# Altium PCB Stylophone.PcbDoc
Units mm, origin at the board's own origin, x right, y up, seen from the top; angles counter-clockwise.
Board outline 90 x 30 mm, 2 copper layers (Top Layer, Bottom Layer); 56 components, 50 nets, 158 pads, 2 vias.
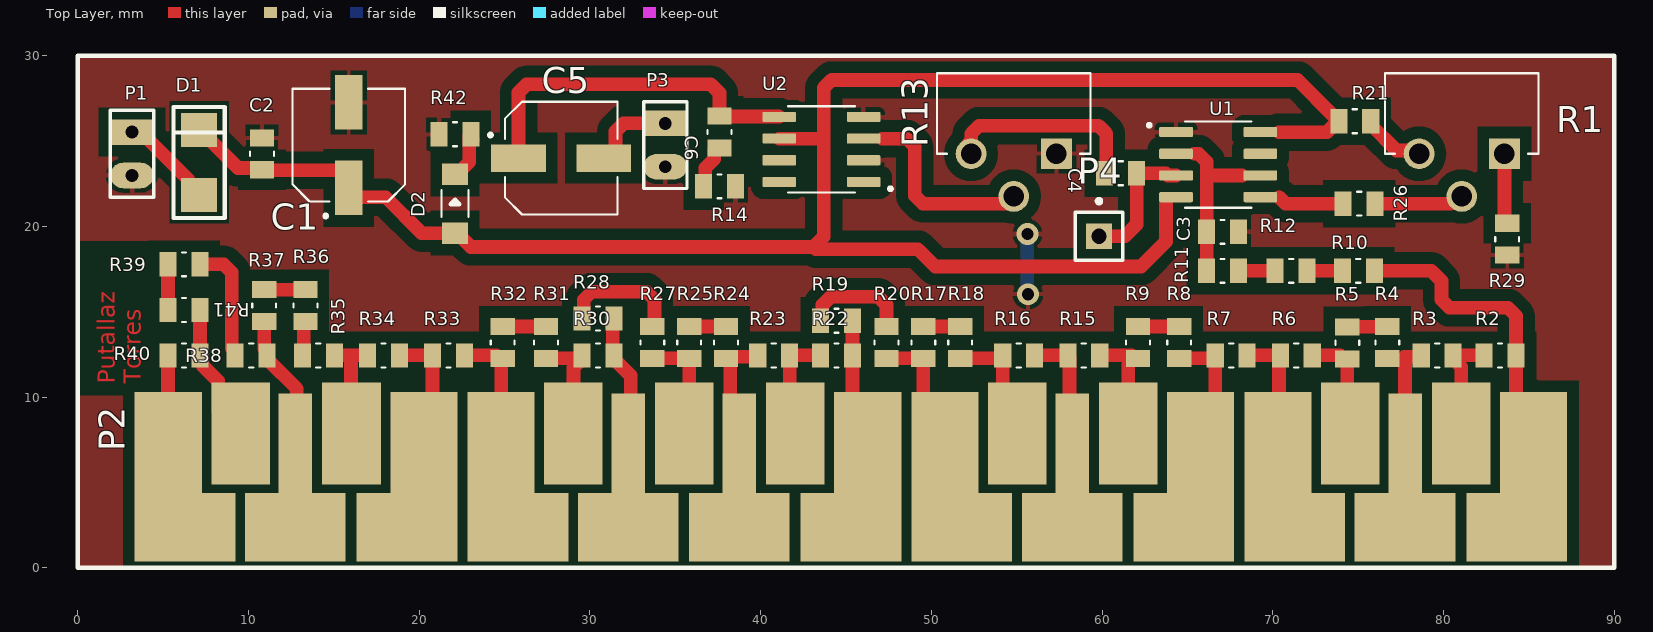
[diagram p0: Top Layer view]
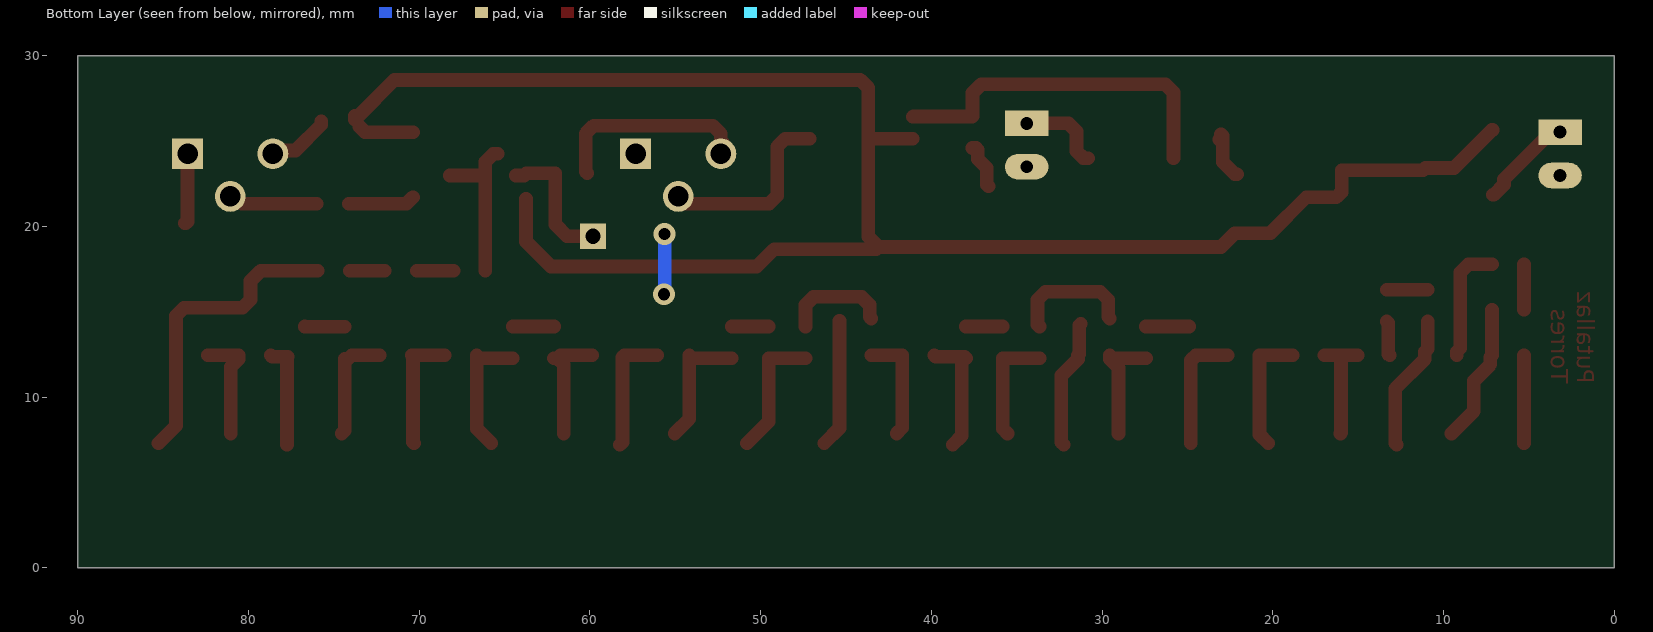
[diagram p1: Bottom Layer view, seen from below]
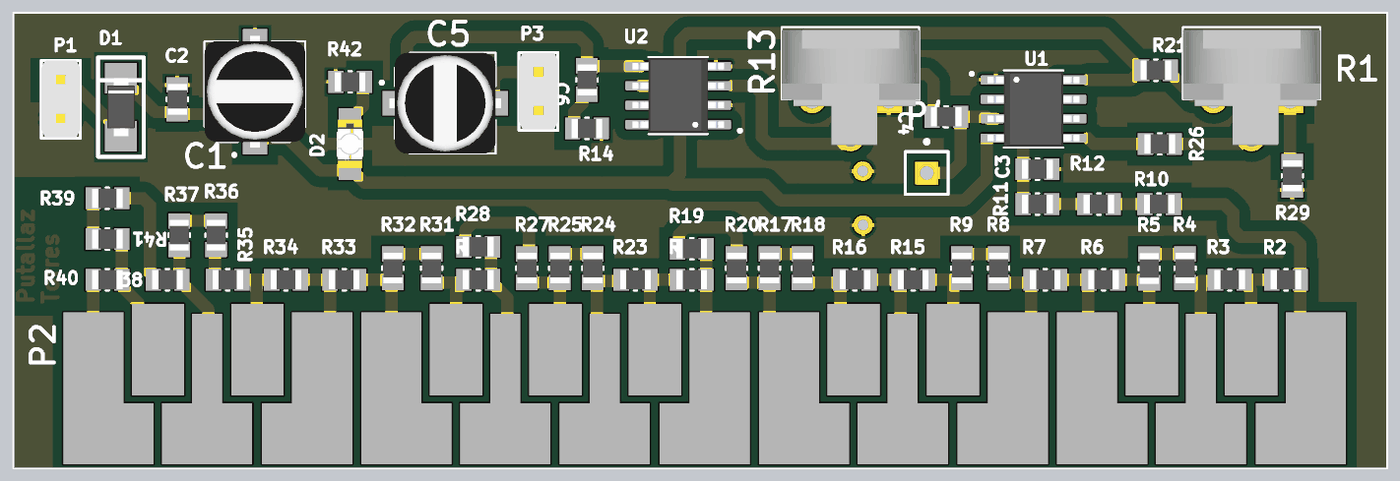
[diagram p2: 3D render of the assembled board from above, using the file's embedded part models]

## Layer stack, top to bottom
Top Solder: solder mask 0.0102, Solder Resist, Dk 3.5
Top Layer: signal copper 0.0356
Dielectric 1: dielectric 0.32, FR-4, Dk 4.8
Bottom Layer: signal copper 0.0356
Bottom Solder: solder mask 0.0102, Solder Resist, Dk 3.5

## Board outline
0,0 0,30 90,30 90,0

## Design rules (kind name [scope] priority, off if disabled: settings)
Clearance [InPolygon] p1: gap=0.7 ignorepadtopadclearanceinfootprint=TRUE
PolygonConnect [All] p1: connectstyle=Relief reliefconductorwidth=0.254 reliefentries=4 polygonreliefangle="90 Angle" airgapwidth=0.254
RoutingVias [All] p1: holewidth=0.711 width=1.27 viastyle="Through Hole" minholewidth=0.711 minwidth=1.27 maxholewidth=0.711 maxwidth=1.27
SolderMaskExpansion [All] p1: expansion=0.102 istentingtop=FALSE
Width [All] p1: maxlimit=1 minlimit=0.7 preferedwidth=0.8
30 further rules are at their usual default settings.

## Components (designator, comment, footprint, x,y, rotation, side; value= is the part's Value field where it differs from the comment)
C1 "100uF 25V" "CAP SMD 100uF 25V" 15.875,24.765 r90 top value=100pF
C2 "100nF" "0805 res-cap" 10.795,24.257 r270 top value=100pF
C3 "33nF" "0805 res-cap" 67.056,19.685 r180 top value=100pF
C4 "100nF" "0805 res-cap" 61.087,23.114 r180 top value=100pF
C5 "100uF" "CAP SMD 100uF 25V" 28.321,24.003 r0 top value=2200uF
C6 "50nF" "0805 res-cap" 37.592,25.527 r90 top value=100pF
D1 "Diode 1N4007" DO214AC 7.112,23.749 r90 top
D2 "LED3" "1206 LED" 22.098,21.336 r90 top
P1 "Header 2" HDR1X2 3.175,25.527 r270 top
P2 "Teclado Stylophone" "Teclado Stylophone" 4.787,0.874 r0 top
P3 "Header 2" HDR1X2 34.417,26.035 r270 top
P4 "Stylus" PIN1 59.817,19.431 r0 top
R1 "Tuning 4k7" "TRIMMING POTENTIOMETER" 83.566,24.257 r180 top value=1k
R2 "1K5" "0805 res" 83.312,12.446 r0 top value=1K
R3 "1K5" "0805 res" 79.629,12.446 r0 top value=1K
R4 "1K5" "0805 res" 76.708,13.208 r270 top value=1K
R5 "100R" "0805 res" 74.363,13.183 r90 top value=1K
R6 "1K8" "0805 res" 71.374,12.446 r0 top value=1K
R7 "1K8" "0805 res" 67.564,12.446 r0 top value=1K
R8 "1K" "0805 res" 64.516,13.208 r90 top
R9 "1K" "0805 res" 62.103,13.208 r90 top
R10 "560R" "0805 res" 75.011,17.399 r0 top value=1K
R11 "12K" "0805 res" 71.074,17.399 r0 top value=1K
R12 "22K" "0805 res" 67.056,17.399 r0 top value=1K
R13 "Volume" "TRIMMING POTENTIOMETER" 57.324,24.257 r180 top value=1k
R14 "10R" "0805 res" 37.592,22.352 r180 top value=1K
R15 "2K2" "0805 res" 58.928,12.446 r0 top value=1K
R16 "2K2" "0805 res" 55.118,12.446 r0 top value=1K
R17 "1K2" "0805 res" 49.53,13.208 r90 top value=1K
R18 "1K2" "0805 res" 51.689,13.208 r90 top value=1K
R19 "1K2" "0805 res" 44.45,14.478 r0 top value=1K
R20 "1K2" "0805 res" 47.371,13.208 r90 top value=1K
R21 "Res1" "0805 res" 74.803,26.162 r180 top value=1K
R22 "2K7" "0805 res" 44.45,12.446 r0 top value=1K
R23 "2K7" "0805 res" 40.767,12.446 r0 top value=1K
R24 "1K5" "0805 res" 37.973,13.208 r270 top value=1K
R25 "1K5" "0805 res" 35.814,13.208 r90 top value=1K
R26 "4k7" "0805 res" 75.057,21.336 r180 top value=1K
R27 "1K5" "0805 res" 33.655,13.208 r270 top value=1K
R28 "1K5" "0805 res" 30.48,14.605 r180 top value=1K
R29 "Res1" "0805 res" 83.727,19.25 r90 top value=3K3
R30 "3K3" "0805 res" 30.48,12.446 r0 top value=1K
R31 "1K8" "0805 res" 27.432,13.208 r270 top value=1K
R32 "1K8" "0805 res" 24.892,13.208 r90 top value=1K
R33 "3K9" "0805 res" 21.717,12.446 r0 top value=1K
R34 "3K9" "0805 res" 17.907,12.446 r0 top value=1K
R35 "2K7" "0805 res" 14.096,12.446 r0 top value=1K
R36 "1K5" "0805 res" 13.335,15.367 r270 top value=1K
R37 "100" "0805 res" 10.922,15.367 r90 top value=1K
R38 "2K7" "0805 res" 10.159,12.446 r0 top value=1K
R39 "1K5" "0805 res" 6.223,17.78 r0 top value=1K
R40 "4K7" "0805 res" 6.223,12.446 r180 top value=1K
R41 "100" "0805 res" 6.223,15.113 r180 top value=1K
R42 "470" "0805 res" 22.098,25.4 r0 top value=1K
U1 "555" SOIC-8 66.802,23.622 r0 top
U2 "LM386" SOIC-8 43.561,24.511 r180 top

## Footprints (in the part's own frame and the unit in brackets; to place one, negate y for a bottom-side part, rotate by r counter-clockwise, add the part's x,y. Pads: shape width x height; smd on the part's side, far side on the other; paste and mask are expansions set on the pad)
"0805 res" [mm]
  rect 1x1.42 smd: 1(-0.935,0) 2(0.935,0)
  silkscreen extent -0.12,-0.7 0.12,0.7, body extent -1,-0.63 1,0.63, height 0.6
"0805 res-cap" [mm]
  rect 1x1.42 smd: 1(-0.935,0) 2(0.935,0)
  silkscreen extent -0.12,-0.7 0.12,0.7, body extent -1,-0.63 1,0.63, height 0.6
"1206 LED" [mm]
  rect 1.25x1.5 smd: 1(-1.725,0) 2(1.725,0)
  silkscreen extent -0.78,-0.8 0.78,0.8, body extent -1.6,-0.8 1.6,0.8, height 1.2
"CAP SMD 100uF 25V" [mm]
  rect 3.2x1.6 smd: 1(-2.5,0) 2(2.5,0)
  silkscreen extent -4.25,-3.3 3.3,3.3, body extent -3.65,-3.3 3.65,3.3, height 5.8
DO214AC [mm]
  rect 2x2.1 smd: 1(-1.9,0) 2(1.9,0)
  silkscreen extent -3.25,-1.5 3.25,1.5, body extent -1.9,-0.9 1.9,0.9, height 1.3
HDR1X2 [mm] "Connector; Header; 2 Position"
  rect 1.5x2.54 hole 0.75: 1(0,0)
  oval 1.5x2.54 hole 0.75: 2(2.54,0)
  silkscreen extent -1.27,-1.27 3.81,1.27, body extent -1.28,-1.27 3.75,1.27, height 11.94
PIN1 [mm] "Connector; Plug"
  rect 1.5x1.5 hole 0.9: 1(0,0)
  silkscreen extent -1.4,-1.4 1.4,2.17
SOIC-8 [mm]
  rrect25% 1.97x0.6 smd: 1(-2.47,1.905) 2(-2.47,0.635) 3(-2.47,-0.635) 4(-2.47,-1.905) 5(2.47,-1.905) 6(2.47,-0.635) 7(2.47,0.635) 8(2.47,1.905)
  silkscreen extent -4.14,-2.52 1.95,2.52, body extent -3,-2.45 3,2.45, height 1.75
"Teclado Stylophone" [mm]
  rect 5.9x4 smd: A1(33.959,1.5) A2(79.5,1.5) B1(40.5,1.5) C1(1.5,1.5) C2(47,1.5) D1(7.959,1.5) D2(53.459,1.5) E1(14.5,1.5) E2(60,1.5) F1(21,1.5) F2(66.5,1.5) G1(27.459,1.5) G2(72.959,1.5)
  rect 1.96x6 smd: A1(33.959,6.338) D1(7.959,6.338) D2(53.459,6.338) G1(27.459,6.338) G2(72.959,6.338)
  rect 3.93x6 smd: A2(80.485,6.429) B1(41.485,6.429) C1(0.515,6.429) C2(46.015,6.429) E1(15.485,6.429) E2(60.985,6.429) F1(20.015,6.429) F2(65.515,6.429)
  rect 3.43x6 smd: A#1(37.25,7) C#1(4.75,7) C#2(50.25,7) D#1(11.25,7) D#2(56.75,7) F#1(24.25,7) F#2(69.75,7) G#1(30.75,7) G#2(76.25,7)
"TRIMMING POTENTIOMETER" [mm]
  rect 1.8x1.8 hole 1.2: 1(0,0)
  round 1.8 hole 1.2: 2(2.5,2.5) 3(5,0)
  silkscreen extent -2,-4.72 7,0, body extent -2.01,-4.53 6.98,3.56, height 10.49

## Part data
C1: library part "Cap Pol1", "Polarized Capacitor (Radial)", LatestRevisionDate=17-Jul-2002, LatestRevisionNote="Re-released for DXP Platform.", PackageDescription="Polarized Capacitor (Radial); 2 Leads", PackageReference=RB7.6-15, Published=8-Jun-2000, Publisher="Altium Limited"
C2 C3 C4 C6: library part Cap, "Capacitor", LatestRevisionDate=17-Jul-2002, LatestRevisionNote="Re-released for DXP Platform.", PackageDescription="Radial Cap, Thru-Hole; 2 Leads; 0.3 in Pin Spacing", PackageReference=RAD-0.3, Published=8-Jun-2000, Publisher="Altium Limited"
C5: library part "Cap Pol D16mm", "Polarized Capacitor (Axial)", LatestRevisionDate=17-Jul-2002, LatestRevisionNote="Re-released for DXP Platform.", PackageDescription="Polarized Capacitor; 2 Leads", PackageReference=POLAR0.8, Published=8-Jun-2000, Publisher="Altium Limited"
D1: "1 Amp General Purpose Rectifier", Code_JEDEC=DO-204-AL, ComponentLink1Description="Manufacturer Link", ComponentLink1URL=http://www.fairchildsemi.com/, ComponentLink2Description=Datasheet, ComponentLink2URL=http://www.fairchildsemi.com/ds/1N%2F1N4001.pdf, DatasheetVersion=1998, LatestRevisionDate=17-Jul-2002, LatestRevisionNote="Re-released for DXP Platform.", PackageDescription="Diode, Axial; Body 5.2 x 2.7 mm (LxDia. max), Lead Dia. 0.86 mm (max)", PackageReference=DO-41, PackageVersion=Aug-1999, Published=8-Jun-2000, Publisher="Altium Limited"
D2: "Typical BLUE SiC LED", DatasheetVersion=16-Apr-2002, LatestRevisionDate=17-Dec-2003, LatestRevisionNote="PCB Footprint replaced.", PackageDescription="SM LED; 2 C-Bend Leads; Body 3.5 x 2.8 x 1.9 mm, inc leads (LxWxH typ)", PackageReference=3.5X2.8X1.9, PackageVersion=16-Apr-2002, Published=8-Jun-2000, Publisher="Altium Limited"
P1 P3: "Header, 2-Pin", LatestRevisionDate=17-Jul-2002, LatestRevisionNote="Re-released for DXP Platform.", Publisher="Altium Limited"
P4: library part Plug, "Plug", LatestRevisionDate=17-Jul-2002, LatestRevisionNote="Re-released for DXP Platform.", Publisher="Altium Limited"
R1 R13: library part Potentiometer, "4K7", position=0.5, SimulationGenericComponent=True
R2 R3 R4 R5 R6 R7 R8 R9 R10 R11 R12 R14 R15 R16 R17 R18 R19 R20 R22 R23 R24 R25 R26 R27 R28 R30 R31 R32 R33 R34 R35 R36 R37 R38 R39 R40 R41 R42: library part Res1, "Resistor", LatestRevisionDate=17-Jul-2002, LatestRevisionNote="Re-released for DXP Platform.", PackageDescription="Axial Device, Thru-Hole; 2 Leads; 0.3 in Pin Spacing", PackageReference=AXIAL-0.3, Published=8-Jun-2000, Publisher="Altium Limited"
R21 R29: "Resistor", LatestRevisionDate=17-Jul-2002, LatestRevisionNote="Re-released for DXP Platform.", PackageDescription="Axial Device, Thru-Hole; 2 Leads; 0.3 in Pin Spacing", PackageReference=AXIAL-0.3, Published=8-Jun-2000, Publisher="Altium Limited"

## Via types
v1: diameter 1.27, hole 0.711, Top Layer to Bottom Layer, 2 vias

## Nets (pads, with @x,y where several pads share a name; then routed paths per layer and width w, separated by ;. In a path a pad name is that pad's centre, name@x,y a point inside that pad or via, vN(x,y) a via of type N, cw(c..) or ccw(c..) an arc to the next point about the centre after c; other vN are vias at no path point)
A1: P2.A1 R23.1 R24.2 | length 7.4
  Top Layer w0.8: P2.A1@38.746,7.212 38.227,7.731 38.227,12.173 38.127,12.273 R24.2 38.059,12.36 39.746,12.36 R23.1
A2: P2.A2 R2.2 R10.2 | length 17.9
  Top Layer w0.8: R10.2 79.287,17.399 79.883,16.803 79.883,15.709 80.352,15.24 83.778,15.24 84.247,14.771 R2.2 84.247,8.328 P2.A2@85.272,7.303
A#1: P2.A#1 R22.1 R23.2 | length 6.5
  Top Layer w0.8: P2.A#1 41.702,8.209 R23.2 R22.1
B1: P2.B1 R19.2 R22.2 | length 7.5
  Top Layer w0.8: R19.2 R22.2 45.385,8.19 P2.B1@46.272,7.303
C1: P2.C1 R40.2 | length 5.1
  Top Layer w0.8: R40.2 5.288,7.317 P2.C1@5.302,7.303
C2: P2.C2 R17.1 R20.1 | length 7.7
  Top Layer w0.8: R20.1 R17.1 49.53,8.575 P2.C2@50.802,7.303
C#1: P2.C#1 R40.1 R41.1 | length 8.2
  Top Layer w0.8: R41.1 R40.1 7.258,12.346 7.258,11.919 8.222,10.955 8.222,9.189 P2.C#1
C#2: P2.C#2 R16.1 R18.1 | length 7.5
  Top Layer w0.8: R18.1 54.083,12.273 R16.1@54.183,12.373 ; R16.1 R16.1@54.183,12.373 ; P2.C#2 54.183,8.728 R16.1@54.183,12.373
D1: P2.D1 R37.1 R38.2 | length 8
  Top Layer w0.8: R37.1 10.922,12.828 11.094,12.656 R38.2 11.094,12.236 12.827,10.503 12.827,7.293 P2.D1@12.746,7.212
D2: P2.D2 R15.1 R16.2 | length 7.3
  Top Layer w0.8: R16.2 R15.1 58.093,12.346 58.093,7.365 P2.D2@58.246,7.212
D#1: P2.D#1 R34.1 R35.2 | length 6.5
  Top Layer w0.8: R35.2 16.002,12.446 ; P2.D#1 16.002,7.909 16.002,12.446 ; R34.1 16.002,12.446
D#2: P2.D#2 R9.1 R15.2 | length 6.9
  Top Layer w0.8: R15.2 61.72,12.446 R9.1@61.893,12.273 ; P2.D#2 61.537,11.917 R9.1@61.893,12.273 ; R9.1 R9.1@61.893,12.273
E1: P2.E1 R33.1 R34.2 | length 7.3
  Top Layer w0.8: R34.2 R33.1 20.782,7.813 P2.E1@20.272,7.303
E2: P2.E2 R7.1 R8.1 | length 7.7
  Top Layer w0.8: R8.1 66.529,12.273 R7.1@66.629,12.373 ; P2.E2@65.772,7.303 66.629,8.16 R7.1@66.629,12.373 ; R7.1 R7.1@66.629,12.373
F1: P2.F1 R32.1 R33.2 | length 7.1
  Top Layer w0.8: R33.2 24.509,12.446 24.682,12.273 24.702,12.273 24.802,12.173 P2.F1@24.802,7.303
F2: P2.F2 R6.1 R7.2 | length 7.1
  Top Layer w0.8: R7.2 R6.1 70.358,12.365 70.358,7.359 P2.F2@70.302,7.303
F#1: P2.F#1 R30.1 R31.2 | length 6.9
  Top Layer w0.8: R31.2 29.445,12.273 R30.1@29.545,12.373 ; P2.F#1 29.037,11.728 29.545,12.236 R30.1@29.545,12.373 ; R30.1 R30.1@29.545,12.373
F#2: P2.F#2 R5.1 R6.2 | length 6.6
  Top Layer w0.8: R6.2 73.955,12.446 74.153,12.248 R5.1 74.363,8.048 P2.F#2
G1: P2.G1 R28.1 R30.2 | length 7.6
  Top Layer w0.8: R28.1@31.242,14.305 31.328,14.219 31.328,12.532 R30.2 31.415,12.236 32.385,11.266 32.385,7.351 P2.G1@32.246,7.212
G2: P2.G2 R3.1 R4.2 | length 6.2
  Top Layer w0.8: P2.G2@77.746,7.212 77.746,12.314 77.701,12.36 78.608,12.36 R3.1
G#1: P2.G#1 R25.1 R27.2 | length 6.7
  Top Layer w0.8: R27.2 R25.1 35.814,8.151 P2.G#1
G#2: P2.G#2 R2.1 R3.2 | length 6.6
  Top Layer w0.8: P2.G#2 81.037,11.763 80.564,12.236 R3.2 R2.1
GND: C1.2 C2.1 C3.1 P1.2 P3.2 R13.1 R14.1 R29.1 R42.1 U1.1 U2.2 U2.4 | length 3.2
  Bottom Layer w0.8: v1@55.626,16.383 v1(55.626,19.558)
  other v1: 55.656,16.032
NetC3_2: C3.2 R12.1 U1.2 U1.6 | length 9.4
  Top Layer w0.8: 65.405,24.257 65.652,24.257 66.121,23.788 66.121,22.987 ; R12.1 C3.2 66.121,22.987 ; 68.199,22.987 66.121,22.987
NetC4_1: C4.1 P4.1 U1.3 | length 7.9
  Top Layer w0.8: P4.1 61.341,19.431 62.022,20.112 C4.1 63.72,23.114 63.847,22.987 U1.3
NetC4_2: C4.2 R13.3 | length 11.3
  Top Layer w0.8: R13.3@52.197,24.892 52.336,25.031 52.336,25.439 52.804,25.908 59.783,25.908 60.252,25.439 60.252,23.214 C4.2
NetC5_1: C5.1 C6.2 U2.5 | length 20.9
  Top Layer w0.8: C5.1 25.821,27.852 26.29,28.321 37.084,28.321 37.592,27.813 C6.2 37.615,26.439 41.068,26.439 U2.5
NetC5_2: C5.2 P3.1 | length 5.1
  Top Layer w0.8: C5.2 31.096,24.003 31.496,24.403 31.496,25.566 31.965,26.035 P3.1
NetC6_1: C6.1 R14.2 | length 2.8
  Top Layer w0.8: R14.2 36.757,22.452 36.757,23.422 37.282,23.947 37.282,24.492 37.382,24.592 C6.1
NetD1_1: D1.1 P1.1 | length 5.6
  Top Layer w0.8: P1.1 3.695,25.527 6.462,22.76 6.462,22.449 7.062,21.849 D1.1
NetD2_2: D2.2 R42.2 | length 3.2
  Top Layer w0.8: D2.2 22.223,23.061 22.933,23.771 22.933,25.3 R42.2 23.033,25.19 R42.2@23.133,25.09
NetR1_1: R1.1 R29.2 | length 4.2
  Top Layer w0.8: R1.1 83.566,20.285 83.666,20.185 R29.2
NetR1_2: R1.2 R26.1 | length 5.2
  Top Layer w0.8: R26.1 80.374,21.336 80.795,21.757 R1.2
NetR1_3: R1.3 R21.1 | length 3.7
  Top Layer w0.8: R21.1 75.738,25.952 77.242,24.448 78.375,24.448 R1.3
NetR4_1: R4.1 R5.2 | length 2.4
  Top Layer w0.8: R5.2 74.376,14.13 76.695,14.13 R4.1
NetR8_2: R8.2 R9.2 | length 2.4
  Top Layer w0.8: R9.2 R8.2
NetR10_1: R10.1 R11.2 | length 2.1
  Top Layer w0.8: R11.2 R10.1
NetR11_1: R11.1 R12.2 | length 2.1
  Top Layer w0.8: R12.2 R11.1
NetR13_2: R13.2 U2.3 | length 10.8
  Top Layer w0.8: 47.117,25.146 48.553,25.146 49.022,24.677 49.022,21.805 49.491,21.336 54.483,21.336 R13.2@54.63,21.483
NetR17_2: R17.2 R18.2 | length 2.2
  Top Layer w0.8: R17.2 R18.2
NetR19_1: R19.1 R20.2 | length 6.3
  Top Layer w0.8: R19.1@43.515,14.605 43.615,14.705 43.615,15.406 44.084,15.875 46.902,15.875 47.371,15.406 R20.2
NetR24_1: R24.1 R25.2 | length 2.2
  Top Layer w0.8: R25.2 R24.1
NetR26_2: R26.2 U1.5 | length 3.9
  Top Layer w0.8: 70.358,21.717 70.739,21.336 R26.2
NetR27_1: R27.1 R28.2 | length 7.3
  Top Layer w0.8: R28.2 29.645,14.705 29.645,15.706 30.114,16.175 33.313,16.175 33.782,15.706 33.782,14.243 33.682,14.143 R27.1
NetR31_1: R31.1 R32.2 | length 2.5
  Top Layer w0.8: R32.2 R31.1
NetR35_1: R35.1 R36.2 | length 2.1
  Top Layer w0.8: R35.1 13.248,12.533 13.248,14.345 R36.2
NetR36_1: R36.1 R37.2 | length 2.4
  Top Layer w0.8: R37.2 R36.1
NetR38_1: R38.1 R39.2 | length 7
  Top Layer w0.8: R39.2 8.548,17.78 9.017,17.311 9.017,12.863 9.224,12.656 R38.1
NetR39_1: R39.1 R41.2 | length 2.7
  Top Layer w0.8: R41.2 R39.1
VCC: C1.1 C2.2 D1.2 D2.1 R21.2 U1.4 U1.8 U2.6 | length 110.2
  Top Layer w0.8: D1.2 7.162,25.649 9.389,23.422 11.076,23.422 11.207,23.292 15.971,23.292 15.971,22.013 16.275,21.71 18.041,21.71 20.14,19.611 D2.1 ; D2.1@22.223,19.611 23.038,18.796 43.219,18.796 ; U2.6 43.688,25.146 ; 43.219,18.669 49.212,18.669 50.228,17.653 62.286,17.653 63.747,19.114 U1.4@63.747,21.617 ; 43.219,18.923 43.688,19.392 43.688,25.146 ; 70.358,25.527 73.172,25.527 R21.2@73.497,25.852 ; R21.2@73.768,26.262 73.768,26.472 73.558,26.472 71.455,28.575 44.157,28.575 43.688,28.106 43.688,25.146
pads on no net: U1.7 U2.1 U2.7 U2.8

## Polygon pours and split planes (outlines as drawn)
no net on Top Layer "NONET_L-01_P-001" (solid, pour order 1): 0,0 3.937,0 3.937,10.541 4.064,10.668 3.937,10.795 0,10.795
GND on Top Layer "GND_L01_P000" (solid, remove dead copper, pour order 0): 0,0 90,0 90,30 0,30

## Other copper
Top Layer:
  text "Putallaz / Torres" at 3.683,10.795 h1 r90

## Silkscreen, mask and mechanical layers (free items; w line width, h text height)
Top Overlay:
  the board outline again, w0.254